# Altium PCB PCB.PcbDoc (part 1 of 2)
Units mm, origin at the board's own origin, x right, y up, seen from the top; angles counter-clockwise.
Board outline 65 x 70 mm, 2 copper layers (Top Layer, Bottom Layer), stack 0.325 mm thick; 95 components, 63 nets, 365 pads, 289 vias.
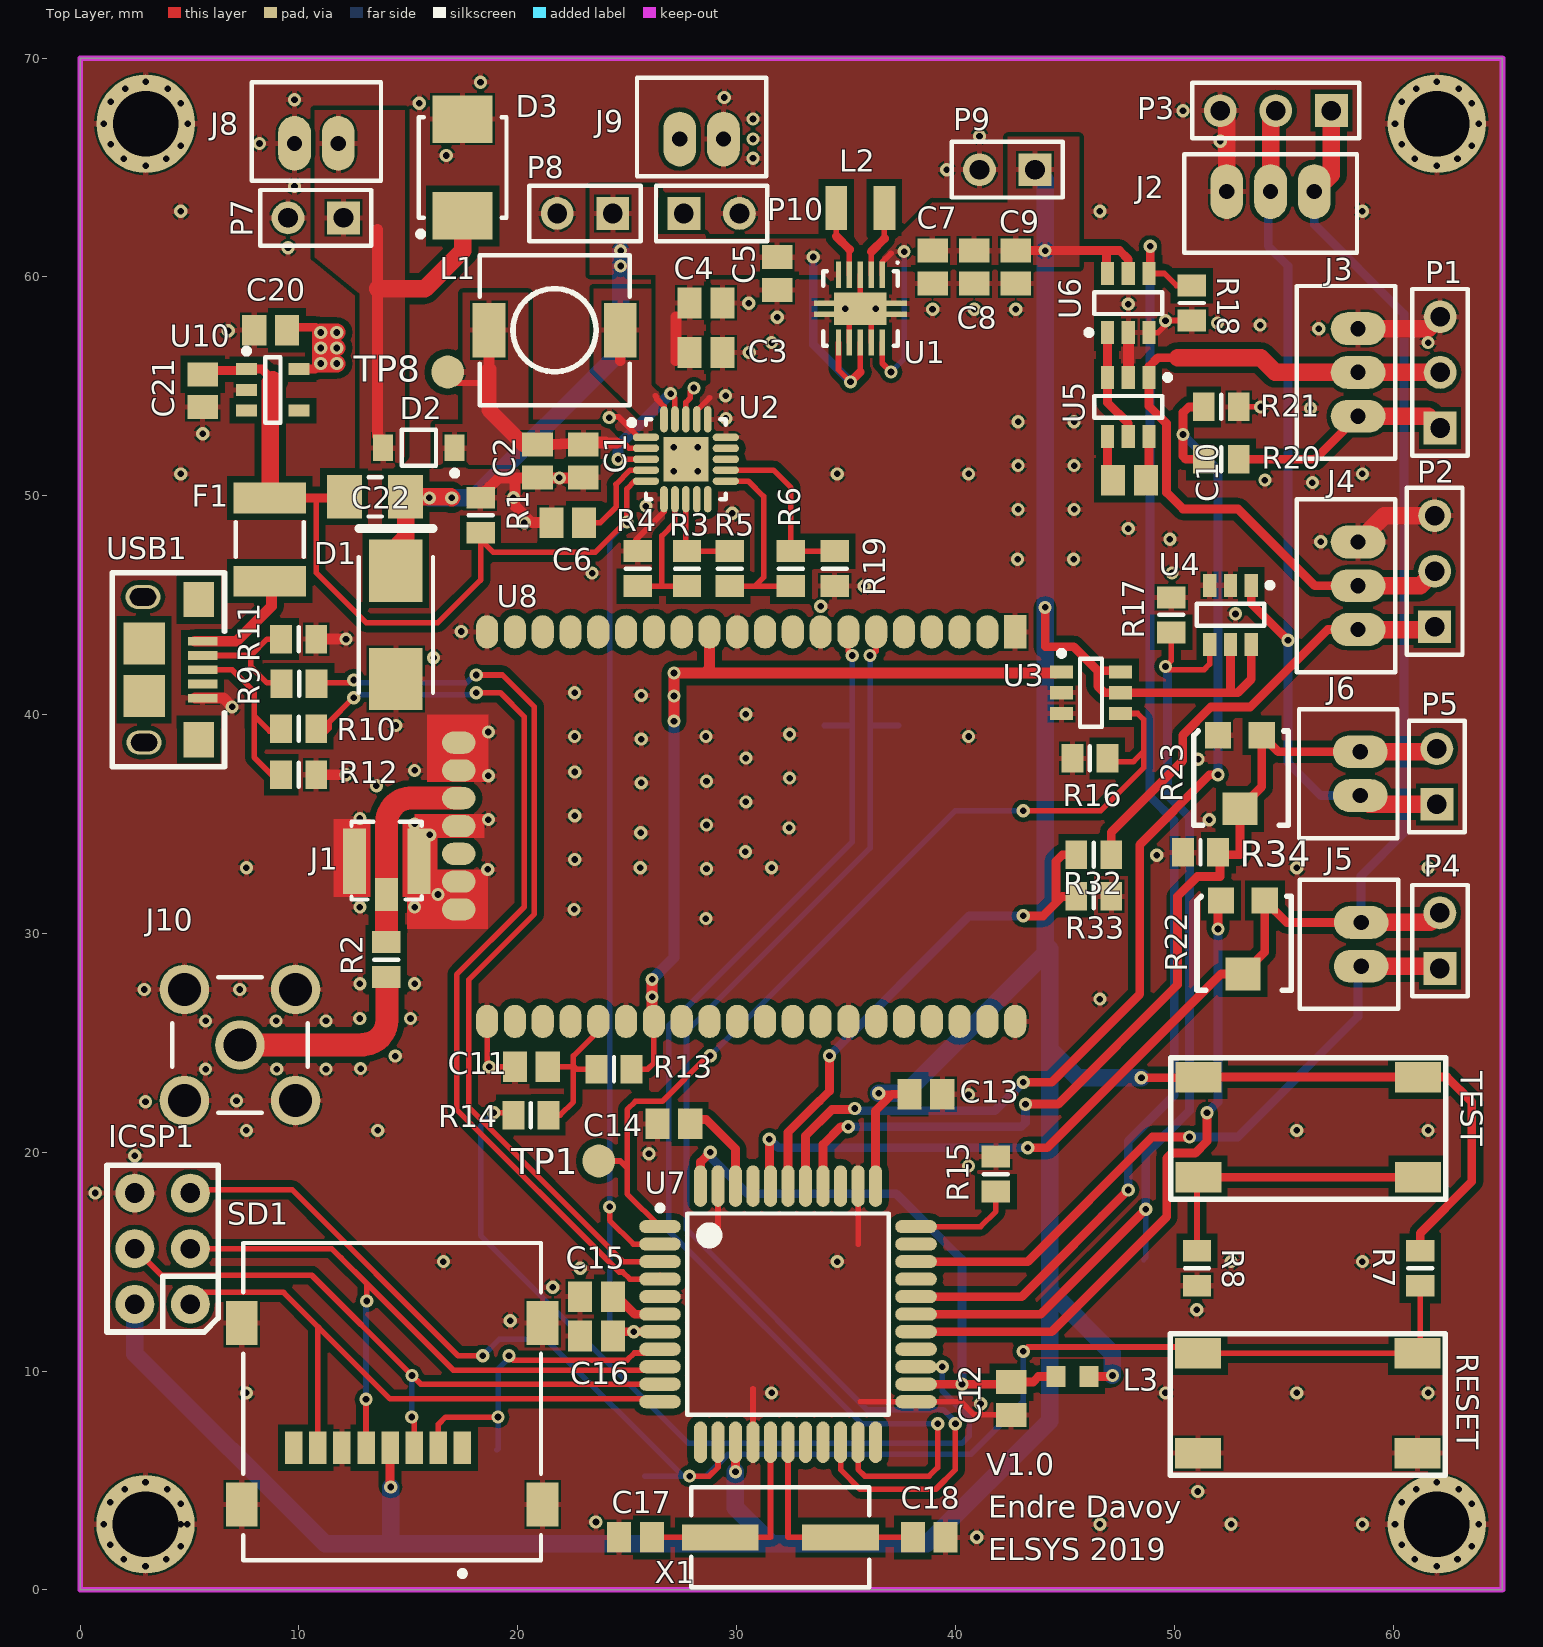
[diagram p0: Top Layer view]
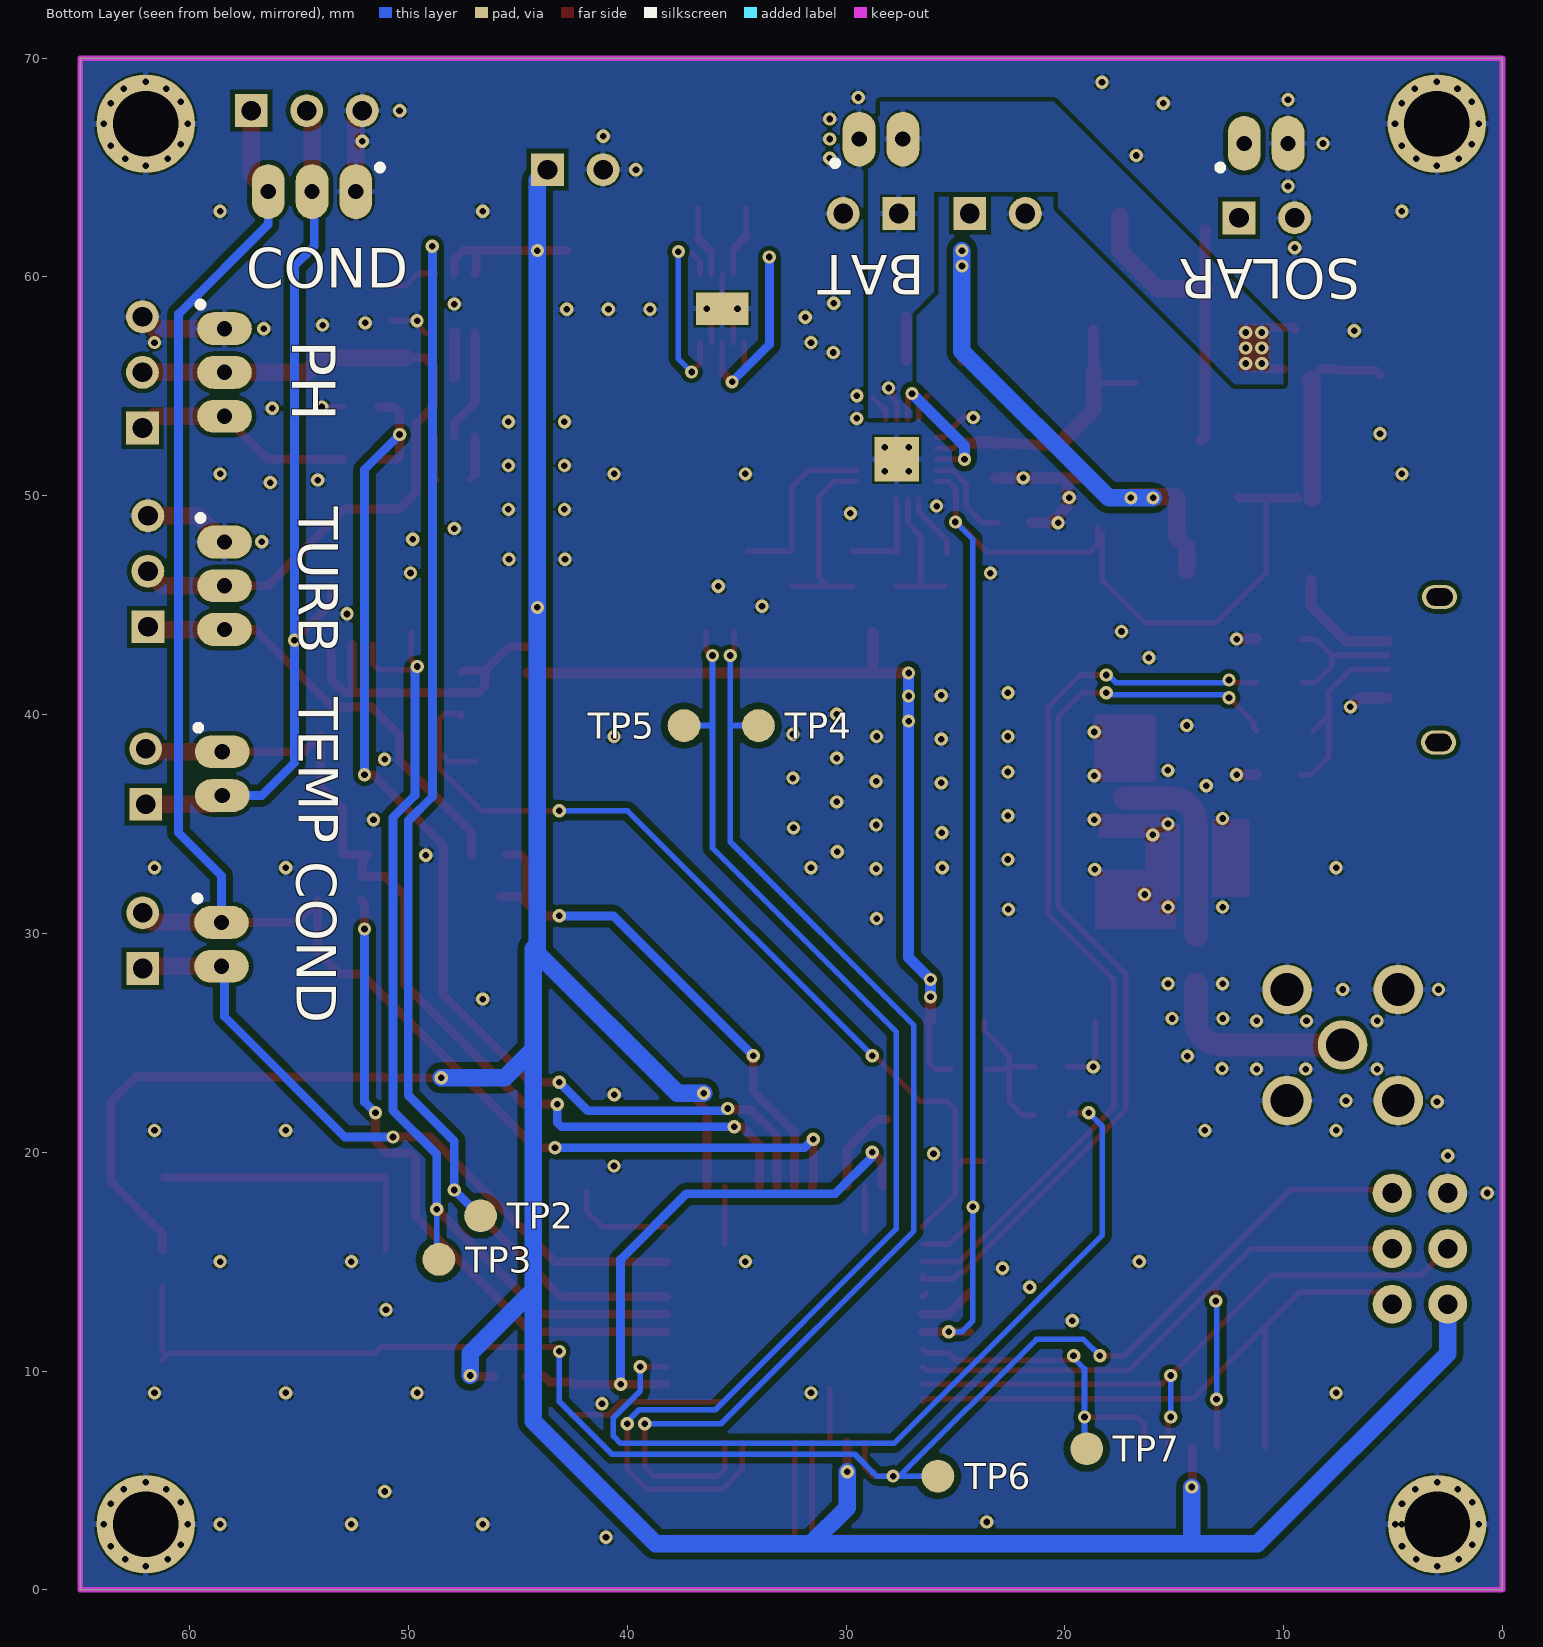
[diagram p1: Bottom Layer view, seen from below]

## Layer stack, top to bottom
Top Solder: solder mask 0.0102, Solder Resist, Dk 3.5
Top Layer: signal copper 0.0356
Dielectric 1: core 0.254, FR-4, Dk 4.2
Bottom Layer: signal copper 0.0356
Bottom Solder: solder mask 0.0102, Solder Resist, Dk 3.5

## Board outline
0,0 65,0 65,70 0,70 0,1.2

## Design rules (kind name [scope] priority, off if disabled: settings)
Clearance [All] p1: gap=0.2 ignorepadtopadclearanceinfootprint=TRUE except(0.1: Arc-Text Track-SMDPad Track-Text Fill-Text Poly-Text Region-Text Text-Text; 0.3: Arc-Poly Arc-Region Track-Poly Track-Region SMDPad-Poly SMDPad-Region)
MinimumSolderMaskSliver [All] p1 off: minsoldermaskwidth=0.254
PolygonConnect [All] p1: connectstyle=Relief reliefconductorwidth=0.254 reliefentries=4 polygonreliefangle="90 Angle" airgapwidth=0.1
RoutingVias [All] p1: holewidth=0.3 width=0.6 viastyle="Through Hole" minholewidth=0.3 minwidth=0.6 maxholewidth=0.711 maxwidth=1.27
SilkToSilkClearance [All] p1 off: silktosilkclearance=0.254
SilkToSolderMaskClearance [IsPad] p1 off: minsilkscreentomaskgap=0.254 clearancetoexposedcopper=TRUE
SolderMaskExpansion SolderMaskExpansion_1 [All] p1: expansion=0.102
SolderMaskExpansion [All] p2: expansion=0.152
Width ANTENNA1 [InNet('ANT50')] p1: maxlimit=2 minlimit=0.254 preferedwidth=0.254
Width ANTENNA2 [InNet('NetJ10_S')] p2: maxlimit=2 minlimit=0.254 preferedwidth=0.254
Width [All] p3: maxlimit=0.8 minlimit=0.254 preferedwidth=0.4 minimp=50.000000 maximp=50.000000 favimp=50.000000
27 further rules are at their usual default settings.

## Classes and differential pairs
component class Power: C1 C2 C3 C4 C5 C6 C7 C8 C9 C20 C21 D2 D3 J8 J9 L1 L2 P7 P8 P9 P10 R1 R3 R4 R5 R6 R19 U1 U2 U10
component class Sensors: J2 J3 J4 J5 J6 P1 P2 P3 P4 P5 R20 R21 R22 R23 R32 R33 R34
component class "Main Schematic": C10 C11 C12 C13 C14 C15 C16 C17 C18 C22 CALIBRATE D1 F1 ICSP1 J1 J10 L3 R2 R7 R8 R9 R10 R11 R12 R13 R14 R15 R16 R17 R18 RESET SD1 U3 U4 U5 U6 U7 U8 USB1 X1

## Components (designator, comment, footprint, x,y, rotation, side; value= is the part's Value field where it differs from the comment)
C1 "Capacitor" C0805 23,51.588 r270 top value=100nF
C2 "Capacitor" C0805 20.9,51.588 r270 top value=4.7uF
C3 "Capacitor" C0805 28.6,56.545 r0 top value=10nF
C4 "Capacitor" C0805 28.6,58.809 r0 top value=4.7uF
C5 "Capacitor" C0805 31.857,60.155 r270 top value=4.7uF
C6 "Capacitor" C0805 22.284,48.768 r180 top value=10nF
C7 "Capacitor" C0805 38.957,60.455 r270 top value=10uF
C8 "Capacitor" C0805 40.857,60.455 r270 top value=10uF
C9 "Capacitor" C0805 42.757,60.455 r270 top value=100nF
C10 "Capacitor" C0805 47.95,50.707 r180 top value=220nF
C11 "Cap" C0805 20.62,23.9 r180 top value=0.1uF
C12 "Capacitor" C0805 42.55,8.75 r270 top value=100nF
C13 "Capacitor" C0805 38.65,22.65 r0 top value=100nF
C14 "Capacitor" C0805 27.134,21.3 r180 top value=100nF
C15 "Capacitor" C0805 23.6,13.4 r180 top value=1uF
C16 "Capacitor" C0805 23.6,11.6 r180 top value=1uF
C17 "Capacitor" C0805 25.379,2.4 r180 top value=22pF
C18 "Capacitor" C0805 38.802,2.4 r0 top value=22pF
C20 "Capacitor" C0805 8.708,57.568 r180 top value=1uF
C21 "Capacitor" C0805 5.6,54.798 r270 top value=1uF
C22 "TAJC107K016RNJ" AVX-TAJ-C-2_M 14.429,44.1 r270 top
D1 "Diode" 3216[1206] 13.477,49.95 r0 top
D2 "MBR120VLSFT3G" ONSC-SOD-123FL-2-498-01_V 15.484,52.191 r180 top
D3 "1SMB5918BT3G" ONSC-SMB-2-403A-03_H_V 17.484,65 r90 top
F1 "Fuse 1" 1812 8.667,48 r90 top
ICSP1 "ICSP" ICSP 5.04,13.055 r180 top
J1 "U.FL-R-SMT" U.FL-R-SMT 14.005,33.3 r0 top
J2 "B3B-PH-K-S(LF)(SN)" "JST B3B-PH-K" 54.4,63.9 r0 top
J3 "B3B-PH-K-S(LF)(SN)" "JST B3B-PH-K" 58.4,55.637 r270 top
J4 "B3B-PH-K-S(LF)(SN)" "JST B3B-PH-K" 58.4,45.887 r270 top
J5 "B2B-PH-K-S(LF)(SN)" "JST B2B-PH-K" 58.539,29.5 r270 top
J6 "B2B-PH-K-S(LF)(SN)" "JST B2B-PH-K" 58.5,37.3 r270 top
J8 "B2B-PH-K-S(LF)(SN)" "JST B2B-PH-K" 10.8,66.1 r180 top
J9 "B2B-PH-K-S(LF)(SN)" "JST B2B-PH-K" 28.4,66.3 r180 top
J10 "0733910060" "MOLEX SD-73391-0060" 7.305,24.9 r0 top
L1 "Inductor" SRR0604 21.684,57.568 r180 top value=22uH
L2 "Inductor" MLP2520 35.657,63.155 r180 top value=2.2uH
L3 "Inductor" C0603 45.35,9.75 r180 top value=10uH
P1 "PH connector" HDR1X3 62.15,53.097 r90 top
P2 "Turbidity connector" HDR1X3 61.9,44.01 r90 top
P3 "Conductivity" HDR1X3 57.18,67.6 r180 top
P4 "Conductivity" HDR1X2 62.139,28.4 r90 top
P5 "Temp" HDR1X2 62,35.9 r90 top
P7 "Header 2" HDR1X2 12.04,62.7 r180 top
P8 "Header 2" HDR1X2 24.343,62.9 r180 top
P9 "Header 2" HDR1X2 43.64,64.9 r180 top
P10 "Header 2" HDR1X2 27.59,62.9 r0 top
R1 "Resistor" 6-0805_L 18.3,49.109 r90 top value=10K
R2 "Res1" 6-0805_L 13.989,28.8 r270 top value=0R
R3 "Resistor" 6-0805_L 27.734,46.668 r270 top value=7.32M
R4 "Resistor" 6-0805_L 25.484,46.668 r90 top value=5.62M
R5 "Resistor" 6-0805_L 29.684,46.668 r270 top value=1.87M
R6 "Resistor" 6-0805_L 32.484,46.668 r90 top value=5.49M
R7 "Resistor" 6-0805_L 61.239,14.7 r270 top value=10K
R8 "Resistor" 6-0805_L 51.039,14.7 r270 top value=10K
R9 "Resistor" 6-0805_L 10.008,41.405 r0 top value=22R
R10 "Resistor" 6-0805_L 9.989,39.35 r0 top value=22R
R11 "Res Varistor" 6-0805_L 9.989,43.45 r180 top
R12 "Res Varistor" 6-0805_L 9.989,37.25 r180 top
R13 "Res1" 6-0805_L 24.4,23.8 r180 top value=10K
R14 "Res1" 6-0805_L 20.6,21.7 r0 top value=0R
R15 "Resistor" 6-0805_L 41.85,19 r90 top value=10K
R16 "Resistor" 6-0805_L 46.146,38 r180 top value=10K
R17 "Resistor" 6-0805_L 49.863,44.559 r90 top value=10K
R18 "Resistor" 6-0805_L 50.8,58.807 r270 top value=10K
R19 "Resistor" 6-0805_L 34.484,46.668 r270 top value=5.62M
R20 "Resistor" 6-0805_L 52.15,51.668 r180 top value=10K
R21 "Resistor" 6-0805_L 52.15,54.059 r0 top value=20K
R22 "Potentiometer" Trimmer 53.139,29.8 r270 top
R23 "Potentiometer" Trimmer 53,37.35 r270 top
R32 "Resistor" 6-0805_L 46.323,33.592 r180 top value=10K
R33 "Resistor" 6-0805_L 46.323,31.692 r0 top value=20K
R34 "Resistor" 6-0805_L 51.2,33.7 r180 top value=10K
RESET "SW-PB" BUTTON 51.089,10.822 r0 top
SD1 "47219-2001" MOLX-47219-2001-8_V 14.261,8.05 r180 top
TEST "SW-PB" BUTTON 51.106,23.433 r0 top (schematic designator CALIBRATE)
TP1 "Comment" Testpoint 23.6,19.6 r0 top
TP2 "Comment" Testpoint 46.8,17.1 r180 bottom
TP3 "Comment" Testpoint 48.7,15.1 r180 bottom
TP4 "Comment" Testpoint 34.1,39.5 r180 bottom
TP5 "Comment" Testpoint 37.5,39.5 r180 bottom
TP6 "Comment" Testpoint 25.9,5.2 r180 bottom
TP7 "Comment" Testpoint 19.1,6.45 r180 bottom
TP8 "Comment" Testpoint 16.7,55.655 r0 top
U1 "TPS63001" DRC0010J 35.657,58.555 r270 top
U2 "BQ25505" S-PVQFN-N20 27.684,51.668 r0 top
U3 "TPS22860" "DBV PSOP" 46.196,41 r0 top
U4 "TPS22860" "DBV PSOP" 52.571,44.559 r270 top
U5 "REG71050" "DBV PSOP" 47.9,54.057 r270 top
U6 "TPS22860" "DBV PSOP" 47.9,58.807 r90 top
U7 "ATmega32U4-MU" TQFP44 32.35,12.6 r0 top
U8 "RN2483" "RN2483 - duplicate" 18.605,43.778 r270 top
U10 "MAX1555EZK+T" MAXM-Z5+1_N 8.808,54.837 r0 top
USB1 "Header 5" 10118193-0001LF 6.275,42.05 r270 top
X1 "16 Mhz" "XTAL CSM-3X" 32,2.4 r0 top value=8MHz

## Footprints (in the part's own frame and the unit in brackets; to place one, negate y for a bottom-side part, rotate by r counter-clockwise, add the part's x,y. Pads: shape width x height; smd on the part's side, far side on the other; paste and mask are expansions set on the pad)
6-0805_L [mm] "Chip Resistor, Body 2.0x1.2mm, IPC High Density"
  rect 1x1.3 smd: 1(-0.8,0) 2(0.8,0)
  silkscreen extent 0,-0.55 0,0.55, body extent -1.07,-0.7 1.07,0.7, height 0.7
1812 [mm] "Chip Capacitor, Body 4.5x3.2mm, IPC High Density"
  rect 1.4x3.3 smd: 1(-1.9,0) 2(1.9,0)
  silkscreen extent -0.8,-1.55 0.8,1.55, body extent -2.4,-1.7 2.4,1.7, height 1.4
3216[1206] [mm] "Metal Electrode Face (MELF) Resistor; Body 3.2 x 1.8 mm (LxDia)"
  rect 1.6x2 smd: 1(-1.4,0) 2(1.4,0)
  silkscreen extent -0.3,-0.9 0.3,0.9
10118193-0001LF [mm] "Mirco USB Connector"
  rect 0.4x1.35 smd: 1(-1.3,-0.675) 2(-0.65,-0.675) 3(0,-0.675) 4(0.65,-0.675) 5(1.3,-0.675)
  oval 1.1x1.6 hole 0.8 slot 1.2 at 90 deg: ""(-3.325,-3.4) ""(3.325,-3.35)
  rect 1.6x1.4 smd: ""(-3.2,-0.85) ""(3.2,-0.85)
  rect 1.9x1.9 smd: ""(-1.2,-3.35) ""(1.2,-3.35)
  silkscreen extent -4.43,-4.8 4.43,0.33, body extent -3.98,-6.01 4.01,-0.59, height 2.77
AVX-TAJ-C-2_M [mm] "Molded Capacitor, 2-Leads, Body 6.2x3.4mm, IPC Low Density"
  rect 2.85x2.45 smd: 1(-2.475,0) 2(2.475,0)
  silkscreen extent -4.4,-1.7 3.1,1.7, body extent -3.32,-1.7 3.32,1.7, height 2.8
BUTTON [mm]
  rect 2.1x1.4 smd: 1(0,0) 1(10.033,0) 2(0,-4.572) 2(10.033,-4.572)
  silkscreen extent -1.27,-5.59 11.3,0.89, body extent 1.14,-5.33 8.89,0.76, height 3
C0603 [mm]
  rect 0.86x0.965 smd: 1(-0.75,0) 2(0.75,0)
  body extent -0.88,-0.48 0.88,0.48, height 0.51
C0805 [mm] "Chip Capacitor, Body 2.0x1.3mm, IPC High Density"
  rect 1.1x1.4 smd: 1(-0.75,0) 2(0.75,0)
  body extent -1.1,-0.72 1.1,0.72, height 1.4
"DBV PSOP" [mm] "TSOP, 6-Leads, Body 2,90x1,60mm, Pitch 0,95mm, IPC Low Density"
  rect 1.05x0.6 smd: 1(-1.35,0.95) 2(-1.35,0) 3(-1.35,-0.95) 4(1.35,-0.95) 5(1.35,0) 6(1.35,0.95)
  silkscreen extent -1.47,-1.55 0.5,1.92, body extent -1.39,-1.55 1.39,1.55, height 1.45
DRC0010J [mm] "SON, 10-Leads, Body 3,00x3,00mm, Pitch 0,50mm, Thermal Pad 2,40x1,49mm, IPC Medium Density"
  rect 1.2x0.25 smd: 1(-1.55,1) 2(-1.55,0.5) 3(-1.55,0) 4(-1.55,-0.5) 5(-1.55,-1) 6(1.55,-1) 7(1.55,-0.5) 8(1.55,0) 9(1.55,0.5) 10(1.55,1)
  rect 0.25x1.2 smd: 11(-0.238,1.524) 11(-0.238,-1.524) 11(0.262,1.524) 11(0.262,-1.524)
  rect 1.49x2.4 smd: 11(0,0)
  rect 1.49x2.4 smd far side: 11(0,0)
  silkscreen extent -2.15,-1.7 1.7,1.75, body extent -1.55,-1.55 1.55,1.55, height 1
HDR1X2 [mm] "Connector; Header; 2 Position"
  rect 1.5x1.5 hole 0.9: 1(0,0)
  round 1.5 hole 0.9: 2(2.54,0)
  silkscreen extent -1.27,-1.27 3.81,1.27
HDR1X3 [mm] "Connector; Header; 3 Position"
  rect 1.5x1.5 hole 0.9: 1(0,0)
  round 1.5 hole 0.9: 2(2.54,0) 3(5.08,0)
  silkscreen extent -1.27,-1.27 6.35,1.27
ICSP [mil]
  round 70 hole 35.43: 1(0,0) 2(100,0) 3(0,-100) 4(100,-100) 5(0,-200) 6(100,-200)
  silkscreen extent -50,-250 150,50, body extent -50,-250 150,50, height 485
"JST B2B-PH-K" [mm]
  oval 1.5x2.5 hole 0.7: 1(-1,0) 2(1,0)
  silkscreen extent -2.95,-2.8 2.95,1.7, body extent -2.95,-2.8 2.95,1.7, height 6
"JST B3B-PH-K" [mm]
  oval 1.5x2.5 hole 0.7: 1(-2,0) 2(0,0) 3(2,0)
  silkscreen extent -3.95,-2.8 3.95,1.7, body extent -3.95,-2.8 3.95,1.7, height 6
MAXM-Z5+1_N [mm] "SOT23, 5-Leads, Body 3x1.65mm, Pitch 0.95mm, IPC Medium Density"
  rect 0.95x0.55 smd: 1(-1.2,0.95) 2(-1.2,0) 3(-1.2,-0.95) 4(1.2,-0.95) 5(1.2,0.95)
  silkscreen extent -1.32,-1.5 0.35,1.9, body extent -0.82,-1.5 0.82,1.5, height 1.1
MLP2520 [mm]
  rect 1x2 smd: 1(1.1,0) 2(-1.1,0)
"MOLEX SD-73391-0060" [mm]
  round 2.262 hole 1.5: G(-2.54,-2.54) G(-2.54,2.54) G(2.54,-2.54) G(2.54,2.54) S(0,0)
  silkscreen extent -3.1,-3.1 3.1,3.1, body extent -3.17,-3.17 3.18,3.18, height 9.6
MOLX-47219-2001-8_V [mm] "CONN, 8-Leads, Body 14.5x13.6mm, Pitch 1.1mm"
  rect 0.8x1.5 smd: 1(-3.205,1.55) 2(-2.105,1.55) 3(-1.005,1.55) 4(0.095,1.55) 5(1.195,1.55) 6(2.295,1.55) 7(3.395,1.55) 8(4.495,1.55)
  rect 1.45x2 smd: 9(6.875,4.15) 10(6.875,-4.15) 11(-6.875,-4.15) 12(-6.875,4.15)
  silkscreen extent -6.8,-7.8 6.8,7.42, body extent -7.3,-7.79 7.3,6.71, height 1.91
ONSC-SMB-2-403A-03_H_V [mm] "Molded, 2-Leads, Body 4.6x3.95mm"
  rect 2.159x2.743 smd: 1(-2.21,0) 2(2.21,0)
  silkscreen extent -3.16,-2 2.3,2.05, body extent -2.3,-1.97 2.3,1.97, height 2.42
ONSC-SOD-123FL-2-498-01_V [mm] "SOD, 2-Leads, Body 2.7x1.65mm"
  rect 0.91x1.22 smd: 1(-1.635,0) 2(1.635,0)
  silkscreen extent -1.76,-0.82 0.78,1.28, body extent -1.35,-0.82 1.35,0.82, height 1
"RN2483 - duplicate" [mil]
  rect 60x40 smd: 1(0,949.8)
  oval 60x40 smd: 2(0,899.8) 3(0,849.8) 4(0,799.8) 5(0,749.8) 6(0,699.8) 7(0,649.8) 8(0,599.8) 9(0,549.8) 10(0,499.8) 11(0,449.8) 12(0,399.8) 13(0,349.8) 14(0,299.8) 15(0,249.8) 16(0,199.8) 17(0,149.8) 18(0,99.8) 19(0,49.8) 20(0,-0.2) 28(700.79,-0.2) 29(700.79,49.8) 30(700.79,99.8) 31(700.79,149.8) 32(700.79,199.8) 33(700.79,249.8) 34(700.79,299.8) 35(700.79,349.8) 36(700.79,399.8) 37(700.79,449.8) 38(700.79,499.8) 39(700.79,549.8) 40(700.79,599.8) 41(700.79,649.8) 42(700.79,699.8) 43(700.79,749.8) 44(700.79,799.8) 45(700.79,849.8) 45(700.79,899.8) 47(700.79,949.8)
  oval 40x60 smd: 21(199.21,-51.18) 22(249.21,-51.18) 23(299.21,-51.18) 24(349.21,-51.18) 25(399.21,-51.18) 26(449.21,-51.18) 27(499.21,-51.18)
  body extent 0,-48 700,973, height 71
S-PVQFN-N20 [mm] "PQFN, 20-Leads, Body 3,50x3,50mm, Pitch 0,50mm, Thermal Pad 2,05x2,05mm, IPC Medium Density"
  oval 1.2x0.35 smd: 1(-1.825,1) 2(-1.825,0.5) 3(-1.825,0) 4(-1.825,-0.5) 5(-1.825,-1) 11(1.825,-1) 12(1.825,-0.5) 13(1.825,0) 14(1.825,0.5) 15(1.825,1)
  oval 0.35x1.2 smd: 6(-1,-1.825) 7(-0.5,-1.825) 8(0,-1.825) 9(0.5,-1.825) 10(1,-1.825) 16(1,1.825) 17(0.5,1.825) 18(0,1.825) 19(-0.5,1.825) 20(-1,1.825)
  rect 2.05x2.05 smd: 21(0,0)
  rect 2.05x2.05 smd far side: 21(0,0)
  silkscreen extent -2.6,-1.83 1.83,1.83, body extent -1.83,-1.83 1.83,1.83, height 1
SRR0604 [mm]
  rect 1.5x2.5 smd: 1(3,0) 2(-3,0)
  silkscreen extent -3.43,-3.43 3.43,3.43, body extent -3.25,-3.25 3.25,3.25, height 4.6
Testpoint [mm]
  round 1.5 smd paste+0: 1(0.1,0)
TQFP44 [mm]
  oval 1.9x0.6 smd: 1(-5.85,4) 2(-5.85,3.2) 3(-5.85,2.4) 4(-5.85,1.6) 5(-5.85,0.8) 6(-5.85,0) 7(-5.85,-0.8) 8(-5.85,-1.6) 9(-5.85,-2.4) 10(-5.85,-3.2) 11(-5.85,-4) 23(5.85,-4) 24(5.85,-3.2) 25(5.85,-2.4) 26(5.85,-1.6) 27(5.85,-0.8) 28(5.85,0) 29(5.85,0.8) 30(5.85,1.6) 31(5.85,2.4) 32(5.85,3.2) 33(5.85,4)
  oval 0.6x1.9 smd: 12(-4,-5.85) 13(-3.2,-5.85) 14(-2.4,-5.85) 15(-1.6,-5.85) 16(-0.8,-5.85) 17(0,-5.85) 18(0.8,-5.85) 19(1.6,-5.85) 20(2.4,-5.85) 21(3.2,-5.85) 22(4,-5.85) 34(4,5.85) 35(3.2,5.85) 36(2.4,5.85) 37(1.6,5.85) 38(0.8,5.85) 39(0,5.85) 40(-0.8,5.85) 41(-1.6,5.85) 42(-2.4,5.85) 43(-3.2,5.85) 44(-4,5.85)
  silkscreen extent -5.97,-4.6 4.6,4.97, body extent -6,-6 6,6, height 1.2
Trimmer [mm]
  rect 1.2x1.2 smd: 1(-1.7,1) 2(-1.7,-1)
  rect 1.5x1.6 smd: 3(1.65,0)
  silkscreen extent -1.9,-2.1 2.4,2.2, body extent -1.8,-2 2.2,2, height 1.7
U.FL-R-SMT [mm]
  rect 1.05x1.5 smd: 1(0,-1.525)
  rect 1.05x3 smd: 2(-1.475,0) 3(1.475,0)
  silkscreen extent -1.6,-1.75 1.6,1.8, body extent -1.5,-1.55 1.5,1.55, height 1.25
"XTAL CSM-3X" [mm] "Crystal 16Mhz"
  rect 3.5x1.2 smd: 1(-2.75,0) 2(2.75,0)
  silkscreen extent -4.06,-2.29 4.06,2.29, body extent -3.8,-2.05 3.8,2.05, height 2.3

## Part data
C1 C2 C3 C4 C5 C6 C7 C8 C9 C10 C12 C13 C14 C15 C16 C17 C18 C20 C21: Package=0603, Tolerance=10%, Voltage=16V
C11: "Capacitor", LatestRevisionDate=17-Jul-2002, LatestRevisionNote="Re-released for DXP Platform.", PackageDescription="Radial Cap, Thru-Hole; 2 Leads; 0.3 in Pin Spacing", PackageReference=RAD-0.3, Published=8-Jun-2000, Publisher="Altium Limited"
C22: library part CMP-2100-03691-1, "Standard Tantalum, 100 uF, +/- 10%, 16 V, -55 to 125 degC, 2-Pin SMD (2312), RoHS, Tape and Reel", Capacitance=100uF, Case/Package=Molded, Case Code (Imperial)=2412, Case Code (Metric)=6032, ESR (Equivalent Series Resistance)=1Ohm, Leakage Current=16uA, Manufacturer=AVX, Max Operating Temperature=125degC, Min Operating Temperature=-55degC, Package Description="2-Pin Surface Mount Device, Body 6 x 3.25 mm", Package Quantity=1, Package Reference=TAJ-C-2, Tolerance=10%, Voltage Rating=16V, Datasheet URL=http://datasheets.avx.com/TAJ.pdf, Datasheet Version=42401.0, Depth=3.2mm, Dissipation Factor=8%, Height=2.8mm, Height - Seated (Max)=0.11inch, Lead Free=LeadFree, Length=6mm, Manufacturer URL=http://www.avx.com/, Number of Pins=2, Packaging=TapeandReel, Polarity=Polar, Radiation Hardening=No, REACH SVHC=NoSVHC, Resistance=1Ohm, RoHSCompliant=True, Termination=SMD/SMT, Voltage Rating (DC)=16V, Width=3.2mm
D1: "Default Diode", Code_JEDEC=DO-214-AB, LatestRevisionDate=17-Jul-2002, LatestRevisionNote="Re-released for DXP Platform.", PackageDescription="DO-214-AB/SMC; 2 C-Bend Leads; Body 7.9 x 5.9 mm, inc. leads (LxW)", PackageReference=SMC, PackageVersion=Sep-1996, Published=8-Jun-2000, Publisher="Altium Limited"
D2: library part CMP-1055-00447-1, "Schottky Power Rectifier, 2-Pin SOD-123, Pb-Free, Tape and Reel", Manufacturer="On Semiconductor", ComponentLink1Description="Manufacturer URL", ComponentLink1URL=http://www.onsemi.com/, ComponentLink2Description=Datasheet, ComponentLink2URL=http://www.onsemi.cn/pub_link/Collateral/MBR120VLSFT1-D.PDF, ComponentLink3Description="Package Specification", ComponentLink3URL=http://www.onsemi.cn/pub_link/Collateral/MBR120VLSFT1-D.PDF, Configuration=Single, DatasheetVersion="Rev. 2", IFSM Max (A)=45, Mounting Technology="Surface Mount", PackageDescription="2-Pin SOD, Body 1.65 x 2.7 mm", PackageReference=SOD-123FL-2-498-01, PackageVersion="Rev. A", Packing="Tape and Reel", PartNumber=MBR120VLSFT3G, RoHS=TRUE
D3: library part CMP-1060-00206-1, "3 W Zener Voltage Regulator, 2-Pin SMB, Pb-Free, Tape and Reel", Manufacturer="On Semiconductor", ComponentLink1Description="Manufacturer URL", ComponentLink1URL=http://www.onsemi.com/, ComponentLink2Description=Datasheet, ComponentLink2URL=http://www.onsemi.com/pub_link/Collateral/1SMB5913BT3-D.PDF, ComponentLink3Description="Package Specification", ComponentLink3URL=http://www.onsemi.com/pub_link/Collateral/1SMB5913BT3-D.PDF, DatasheetVersion="Rev. 8", Mounting Technology="Surface Mount", PackageDescription="2-Pin Small Molded Package, J-Bend Lead, Body 4.33 x 3.625 mm", PackageReference=SMB-2-403A-03_H, PackageVersion="Rev. H, 05/2011", Packing="Tape and Reel", PartNumber=1SMB5918BT3G, RoHS=Pb-Free, VZ Typ (V)=5.1
F1: "Fuse", LatestRevisionDate=17-Jul-2002, LatestRevisionNote="Re-released for DXP Platform.", PackageDescription="Thru-Hole; 2 Leads", PackageReference=PIN-W2/E2.8, Published=8-Jun-2000, Publisher="Altium Limited"
J2 J3 J4: "CONN HEADER PH TOP 3POS 2MM", Colour=Natural, Manufacturer="JST Sales America Inc.", Supplier Part Number 1=455-1705-ND, ComponentLink1Description=Datasheet, ComponentLink1URL=http://www.jst-mfg.com/product/pdf/eng/ePH.pdf, ComponentLink2Description="Digi-Key Listing", ComponentLink2URL=http://www.digikey.com/product-detail/en/jst-sales-america-inc/B3B-PH-K-S(LF)(SN)/455-1705-ND/926612, Contact Finish=Tin, Fastening Type="Detent Lock", Number Of Positions=3, Number Of Rows=1, PartId=29448, Part Number=B3B-PH-K-S(LF)(SN), Pitch="0.079\" (2.00mm)", Price=0,19, Series=PH, Supplier 1=Digi-Key, Type="Header, Shrouded"
J5 J6 J8 J9: "CONN HEADER PH TOP 2POS 2MM", Colour=Natural, Manufacturer="JST Sales America Inc.", Supplier Part Number 1=455-1704-ND, ComponentLink1Description=Datasheet, ComponentLink1URL=http://www.jst-mfg.com/product/pdf/eng/ePH.pdf, ComponentLink2Description="Digi-Key Listing", ComponentLink2URL=http://www.digikey.com/product-detail/en/jst-sales-america-inc/B2B-PH-K-S(LF)(SN)/455-1704-ND/926611, Contact Finish=Tin, Fastening Type="Detent Lock", Number Of Positions=2, Number Of Rows=1, PartId=29447, Part Number=B2B-PH-K-S(LF)(SN), Pitch="0.079\" (2.00mm)", Price=0,17, Series=PH, Supplier 1=Digi-Key, Type="Header, Shrouded"
J10: "CONN SMA JACK STR 50 OHM PCB", Part Number=0733910060
L1: Case/Package=0604, Current Rating=900mA, DC Resistance (DCR)=190mR, Frequency=25MHz, Inductance=22uh, Inductance Tolerance=20%, Manufacturer=Bourns, Max Operating Temperature=125°C, Min Operating Temperature=-40°C, Package Quantity=1000, Resistance=190MR, Saturation Current=1.2A, Supplier Part Number 1=652-SRR0604-220ML, Test Frequency=1kHz, ComponentLink1Description=http://uk.rs-online.com/webdocs/0fa5/0900766b80fa5950.pdf, ComponentLink1URL=http://uk.rs-online.com/webdocs/0fa5/0900766b80fa5950.pdf, ComponentLink2Description=https://www.alliedelec.com/m/d/db85a2264958f44ba0f102d64e276dc0.pdf, ComponentLink2URL=https://www.alliedelec.com/m/d/db85a2264958f44ba0f102d64e276dc0.pdf, ComponentLink3Description=http://www.bourns.com/docs/Product-Datasheets/SRR0604.pdf, ComponentLink3URL=http://www.bourns.com/docs/Product-Datasheets/SRR0604.pdf, ComponentLink4Description=https://www.bourns.com/docs/Product-Datasheets/SRR0604.pdf, ComponentLink4URL=https://www.bourns.com/docs/Product-Datasheets/SRR0604.pdf, ComponentLink5Description=http://www.farnell.com/datasheets/1723201.pdf, ComponentLink5URL=http://www.farnell.com/datasheets/1723201.pdf, ComponentLink6Description=http://components.arrow.com/part/dataview/41632166S7459348N1506, ComponentLink6URL=http://components.arrow.com/part/dataview/41632166S7459348N1506, ComponentLink7Description=http://www.bourns.com/pdfs/SRR0604.pdf, ComponentLink7URL=http://www.bourns.com/pdfs/SRR0604.pdf, Composition=Wirewound, Core Material=Ferrite, DC Current=900mA, Depth=6.7mm, Height=4.8mm, Height - Seated (Max)=0.189inch, Length=6.5mm, Material=Steel, Max DC Current=900mA, Military Standard=Not, Mount="Surface Mount", Packaging="Tape and Reel", Pricing 1="1=0.71, 10=0.658, 50=0.658, 100=0.476, 1000=0.365, 10000=0.365 (USD)", Q Factor=16, REACH SVHC="No SVHC", RMS Current (Irms)=900mA, Self Resonant Frequency=25MHz, Shielding=Shielded, Stock 1=4936, Supplier 1=Mouser, Termination=SMD/SMT, Tolerance=20%, Width=6.5mm
P1 P2 P3: library part "Header 3", "Header, 3-Pin", LatestRevisionDate=17-Jul-2002, LatestRevisionNote="Re-released for DXP Platform.", Publisher="Altium Limited"
P4 P5: library part "Header 2", "Header, 2-Pin", LatestRevisionDate=17-Jul-2002, LatestRevisionNote="Re-released for DXP Platform.", Publisher="Altium Limited"
P7 P8 P9 P10: "Header, 2-Pin", LatestRevisionDate=17-Jul-2002, LatestRevisionNote="Re-released for DXP Platform.", Publisher="Altium Limited"
R1 R3 R4 R5 R6 R7 R8 R9 R10 R15 R16 R17 R18 R19 R20 R21 R32 R33 R34: Package=0602, Power Rating=1/4W, Tolerance=1%
R2 R13 R14: "Resistor", LatestRevisionDate=17-Jul-2002, LatestRevisionNote="Re-released for DXP Platform.", PackageDescription="Axial Device, Thru-Hole; 2 Leads; 0.3 in Pin Spacing", PackageReference=AXIAL-0.3, Published=8-Jun-2000, Publisher="Altium Limited"
R11 R12: "Varistor (Voltage-Sensitive Resistor)", Capacitance=0.5pF, Case/Package=0603, Case Code (Metric)=1608, Clamping Voltage=20V, Current Rating=50nA, Manufacturer=Bourns, Manufacturer Part Number=CG0603MLC-05E, Max Operating Temperature=85°C, Max Voltage Rating (DC)=5V, Min Operating Temperature=-40°C, Package Quantity=1, Supplier Part Number 1=652-CG0603MLC-05E, Voltage Rating (AC)=8V, Case Code (Imperial)=0603, Code_IPC=RESC2012, ComponentLink1Description=https://www.bourns.com/docs/Product-Datasheets/MLC.pdf, ComponentLink1URL=https://www.bourns.com/docs/Product-Datasheets/MLC.pdf, ComponentLink2Description=http://www.farnell.com/datasheets/1785244.pdf, ComponentLink2URL=http://www.farnell.com/datasheets/1785244.pdf, ComponentLink3Description=http://www.jameco.com/Jameco/Products/ProdDS/1163231.pdf, ComponentLink3URL=http://www.jameco.com/Jameco/Products/ProdDS/1163231.pdf, ComponentLink4Description=http://www.bourns.com/docs/Product-Datasheets/MLC.pdf, ComponentLink4URL=http://www.bourns.com/docs/Product-Datasheets/MLC.pdf, Contact Plating=Tin, Depth=0.8mm, Element Configuration=Single, LatestRevisionDate=29-May-2009, LatestRevisionNote="IPC-7351 Footprint Added.", Leakage Current=50nA, Length=1.6mm, Number of Channels=1, Number of Circuits=1, Number of Pins=2, Operating Supply Voltage=5V, PackageDescription="Chip Resistor 0805 Case Size", PackageReference=6-0805, PackageVersion=Mar-2003, Packaging="Tape and Reel", Pricing 1="1=0.51, 10=0.294, 50=0.294, 100=0.171, 1000=0.107, 10000=0.08 (USD)", Published=24-Mar-1999, Publisher="Altium Limited", Radiation Hardening=No, REACH SVHC="No SVHC", Stock 1=88623, Supplier 1=Mouser, Termination=SMD/SMT, Thickness=0.8mm, Turn-On Delay Time=1ns, Voltage=5V, Voltage Rating (DC)=5V, Width=0.8mm, Working Voltage=5V
RESET TEST: "Switch", LatestRevisionDate=17-Jul-2002, LatestRevisionNote="Re-released for DXP Platform.", PackageDescription="Switch; 2 Leads", PackageReference=SPST-2, Published=24-Mar-1999, Publisher="Altium Limited"
SD1: library part CMP-2000-05245-1, "MicroSD Card Connector, Hinge Type, -40 to 85 degC, 8-Pin SMD, RoHS, Tape and Reel", Current Rating=500mA, Manufacturer=Molex, Voltage Rating=100VDC, =0472192001, Brand=Molex, Card Type=microSD, Contact Material=CopperAlloy, Datasheet URL=http://www.molex.com/pdm_docs/sd/472192001_sd.pdf, Datasheet Version="Rev. F, 06/2009", Factory Pack Quantity=2400, Housing Material=Thermoplastic, Insertion - Extraction Style=Hinged, Manufacturer URL=http://www.molex.com/, Mounting Style=SMD/SMT, Number of Contacts=8, Packaging=Reel, Pitch=1.09mm, Product=CardConnectors, Product Category=MemoryCardConnectors, RoHS=Details, Series=47219, Termination Style=SMD
U3 U4 U6: "Load switch", ComponentLink1Description=datasheet, ComponentLink1URL=http://www.ti.com/lit/ds/symlink/tps22860.pdf
U5: "Reguator 5V"
U7: "8-bit AVR Microcontroller, 2.7-5.5V, 32KB Flash, 2.5KB EEPROM, 1KB SRAM, USB Controller, 44-pin QFN, Industrial Grade (-40°C to 85°C)", Supplier Part Number 1=ATMEGA32U4-MU-ND, Code_JEDEC=MO-220-VKKD-1, ComponentLink1Description="Manufacturer Link", ComponentLink1URL=http://www.atmel.com/products/avr/default.asp?, ComponentLink2Description="ATmega16U4/32U4 Datasheet", ComponentLink2URL=http://www.atmel.com/dyn/resources/prod_documents/doc7766.pdf, ComponentLink3Description="ATmega16U4 ATmega32U4 Summary", ComponentLink3URL=http://www.atmel.com/dyn/resources/prod_documents/7766S.pdf, ComponentLink4Description="Atmel.com Home", ComponentLink4URL=http://www.atmel.com, DatasheetVersion="revD, Jan-2009", PackageDescription="44-Pin Quad Flat No-Lead Package, 7 x 7 mm Body, 0.5 mm Pitch (QFN)", PackageReference=44PW, PackageVersion="revF, Jul-2007", Published=1-Apr-2010, Publisher="Altium Limited", Supplier 1=Digi-Key, Supplier 2=Mouser, Supplier Part Number 2=556-ATMEGA32U4-MU
U10: library part CMP-0246-00648-1, "Dual-Input USB/AC Adapter 1-Cell Li+ Battery Charger, 4.2 V Charger Voltage, 0.28 A DC Charging Current, 5-Pin TSOT Package, RoHS, Tape and Reel", Manufacturer=Maxim, Operating Temperature Range="-40 to 85 degC", Package=TSOT, Charger (V)=4.2, ComponentLink1Description="Manufacturer URL", ComponentLink1URL=http://www.maximintegrated.com/, ComponentLink2Description=Datasheet, ComponentLink2URL=http://datasheets.maximintegrated.com/en/ds/MAX1551-MAX1555.pdf, ComponentLink3Description="Package Specification", ComponentLink3URL=http://pdfserv.maximintegrated.com/package_dwgs/21-0113.PDF, DatasheetVersion="Rev. 0", ICHG Typ="0.28 A", Lithium Ion Cells=1, Max Charging VIN (V)=7, Max Protected VIN (V)=7, Mounting Technology="Surface Mount", PackageDescription="5-Pin Thin SOT23, Body 2.9 x 1.6 mm, Pitch 0.95 mm", PackageReference=Z5+1, PackageVersion="Rev. D", Packing="Tape and Reel", PartNumber=MAX1555EZK+T, RoHS=TRUE
USB1: "Header, 5-Pin", LatestRevisionDate=17-Jul-2002, LatestRevisionNote="Re-released for DXP Platform.", Publisher="Altium Limited"
X1: library part NX2520SA-16MHZ-STD-CSW-5, "XTAL SMD 2520, 16MHz, 8pF, ±15ppm", Manufacturer=NDK, Supplier part number=644-1169-1-ND, Artikkelnr Noca=22019192, Artikkelnr Simpro=N.A., Datasheet=http://www.ndk.com/images/products/catalog/c_NX2520SA-STD-CSW-5_e.pdf, Footprint Doc=BT-XTAL_2520, LatestRevisionDate=2012-06-15, Manufacturer Part Number=NX2520SA-16MHZ-STD-CSW-5, Note="XTAL SMD 16.000MHz", Part Number=NX2520SA-16MHZ-STD-CSW-5, Pin Count=4, Published=2012-06-15, Publisher="Nordic Semiconductor", Supplier=Digi-Key
L3: Code_IEC=1005, Code_JEITA=0402, LatestRevisionDate=29-May-2009, LatestRevisionNote="IPC-7351 Footprint Added.", PackageDescription="Chip Inductor", PackageReference=0402-A, Published=8-Jun-2000, Publisher="Altium Limited"
U1: ComponentLink1Description=datasheet, ComponentLink1URL=http://www.ti.com/lit/ds/symlink/tps63001.pdf
U2: ComponentLink1Description=datasheet, ComponentLink1URL=http://www.ti.com/lit/ds/symlink/bq25505.pdf

## Free pads (board coordinates)
  round 4.5 hole 3: 1(2.989,3) 1(3,67) 1(62,3) 1(62,67)

## Via types
v1: diameter 0.6, hole 0.3, Top Layer to Bottom Layer, 189 vias
v2: diameter 0.61, hole 0.305, Top Layer to Bottom Layer, 100 vias

## Nets (pads, with @x,y where several pads share a name; then routed paths per layer and width w, separated by ;. In a path a pad name is that pad's centre, name@x,y a point inside that pad or via, vN(x,y) a via of type N, cw(c..) or ccw(c..) an arc to the next point about the centre after c; other vN are vias at no path point)
3.3V: C7.1 C8.1 C9.1 C13.1 ICSP1.2 L3.1 P9.1 R7.1 SD1.4 TEST.1 U1.1 U1.10 U3.5 U3.6 U4.5 U4.6 U6.5 U6.6 U7.14 U7.34 | length 201.8
  Top Layer w0.254: v2(36.5,22.7) C13.1@37.85,22.7 ; U1.10 36.657,56.055 v1(37.057,55.655) ; U1.1 36.657,60.678 37.057,61.078
  Top Layer w0.4: SD1.4 14.166,4.734 v2(14.2,4.7) ; v2(29.95,5.4) U7.14 ; U7.34 36.35,21.9 37.1,22.65 C13.1 ; C9.1 v1(44.1,61.205) 46.9,61.205 ; v1(44.1,44.9) 44.1,43.1 45.4,43.1 46.5,42 ; L3.1@46.15,9.8 L3.1 47.125,9.75 v2(47.175,9.8) ; U6.6 46.9,60.207 46.9,61.205 ; U3.6 47.496,42 46.5,42 ; U6.5 47.9,60.805 47.5,61.205 46.9,61.205 ; v2(48.5,23.4) TEST.1@51.006,23.4 ; TEST.1@51.106,23.433 61.139,23.433 62.467,23.433 63.6,22.3 63.6,18.661 61.239,16.3 R7.1 ; U4.5 52.571,41 ; U4.6 53.521,41.621 52.9,41 52.571,41 ; 46.5,42 46.5,41.3 46.8,41 U3.5 52.571,41
  Bottom Layer w0.254: v1(37.057,55.655) 37.657,56.255 v1(37.657,61.155)
  Bottom Layer w0.8: ICSP1.2 2.5,10.8 11.2,2.1 14.2,2.1 ; v2(14.2,4.7) 14.2,2.1 ; v2(29.95,5.4) 29.95,3.75 31.6,2.1 ; v2(36.5,22.7) 37.7,22.7 44.1,29.1 ; P9.1 44.1,64.44 v1(44.1,61.205) v1(44.1,44.9) 44.1,29.1 ; v2(47.175,9.8) 47.175,10.825 44.3,13.7 ; v2(48.5,23.4) 45.6,23.4 44.3,24.7 ; 14.2,2.1 31.6,2.1 ; 31.6,2.1 38.7,2.1 44.3,7.7 44.3,13.7 ; 44.1,29.1 44.3,29.3 44.3,24.7 ; 44.3,13.7 44.3,24.7
\E\N\: C16.1 C21.1 D1.1 F1.2 R1.1 U2.5 U7.2 U7.7 U10.1 | length 80.8
  Top Layer w0.254: 10.8,49.9 10.8,46.472 13.072,44.2 16.35,44.2 18.3,46.15 R1.1 ; R1.1@18.484,48.568 18.484,47.809 18.884,47.409 23.534,47.409 v1@24.962,48.838 ; v1(24.2,17.5) 24.2,16.884 25.284,15.8 U7.2 ; v1@24.984,48.859 24.984,50.309 25.343,50.668 U2.5
  Top Layer w0.4: C21.1@5.6,55.518 5.8,55.718 7.54,55.718 U10.1 8.313,55.787 8.8,55.3 ; F1.2@9.4,49.962 9.338,49.9 10.8,49.9 12.027,49.9 D1.1 ; C16.1@24.35,11.8 v2(25.3,11.8) U7.7
  Top Layer w0.8: F1.2 8.683,49.916 8.683,55.183 8.8,55.3
  Bottom Layer w0.254: v1(25,48.8) 24.2,48 v1(24.2,17.5) 24.2,12.3 24.7,11.8 v2(25.3,11.8)
AD0: U7.36
AD1: J6.1 P5.2 R23.1 R23.3 R34.1 U7.37 | length 44.5
  Top Layer w0.4: U7.37 33.95,20.35 34.761,21.161 v2(35.11,21.161) ; v2(43.2,22.2) 44.7,22.2 50.15,27.65 50.15,31.692 51.054,32.596 52.096,32.596 52.096,33.362 51.858,33.6 53,33.6 R23.3 54,36.7 R23.1 54.75,38.3 J6.1
  Top Layer w0.8: J6.1 61.86,38.3 P5.2
  Bottom Layer w0.4: v2(35.11,21.161) 43,21.161 43.2,21.361 v2(43.2,22.2)
AD2: R20.2 R21.1 U7.38 | length 52.3
  Top Layer w0.4: U7.38 33.15,20.75 34.348,21.948 35.348,21.948 v2(35.4,22) ; v2(43.1,23.2) 44.4,23.2 48.419,27.219 48.419,34.056 51.613,37.25 v2(52,37.25) ; R20.2 50.532,51.668 50.4,51.8 v2(50.4,52.8) 50.4,53.8 50.659,54.059 R21.1
  Bottom Layer w0.4: v2(35.4,22) 35.5,21.9 41.8,21.9 v2(43.1,23.2) ; v2(50.4,52.8) 52,51.2 v2(52,37.25)
AD3: R32.2 R33.1 U7.39 | length 24.9
  Top Layer w0.4: U7.39 32.35,20.913 33.782,22.345 33.792,22.345 34.244,22.797 v2(34.244,24.414) ; v2(43.1,30.8) 44,30.8 44.6,31.4 ; R33.1 44.892,31.692 ; R32.2 44.892,33.592 44.6,33.3 44.6,31.4 ; R33.1@45.8,31.7 44.9,31.7 44.892,31.692 ; 44.6,31.4 44.892,31.692
  Bottom Layer w0.4: v2(34.244,24.414) 40.63,30.8 v2(43.1,30.8)
AD4: J2.3 J5.1 P3.1 P4.2 R22.1 R22.3 U7.40 | length 79.6
  Top Layer w0.4: v2(31.5,20.6) 31.5,18.5 U7.40 ; v2(43.3,20.2) 44.2,20.2 52.15,28.15 R22.3 54.139,29.15 R22.1 55.139,30.5 J5.1
  Top Layer w0.8: J2.3 57.18,64.68 P3.1 ; J5.1 61.699,30.5 P4.2
  Bottom Layer w0.4: v2(31.5,20.6) 31.9,20.2 v2(43.3,20.2) ; J2.3 56.4,62.4 60.5,58.3 60.5,34.6 58.539,32.639 J5.1
AD5: U7.41
ANT50: J1.1 R2.1 U8.23 | length 10.1
  Top Layer w1.05: R2.1@13.989,29.9 14.005,29.916 J1.1 ; J1.1@14.005,31.753 14.005,35.033 ; U8.23 15.079,36.178 ccw(c15.079,35.154) 14.355,35.878 ; 14.005,35.033 cw(c15.2,35.033) 14.355,35.878 ; 14.005,35.033 cw(c15.2,35.033) 14.273,35.786 cw(c15.2,35.033) 14.355,35.878
CAL: R8.1 TEST.2 | length 13.4
  Top Layer w0.254: R8.1 51.039,18.861 TEST.2@51.078,18.9
  Top Layer w0.4: TEST.2@51.106,18.861 TEST.2@61.139,18.861
CS: SD1.2 TP7.1 U7.8 | length 15.7
  Top Layer w0.254: SD1.2 16.366,7.566 16.7,7.9 v2(19.1,7.9) ; v2(19.6,10.7) 19.8,10.5 25,10.5 25.327,10.827 26.327,10.827 U7.8
  Bottom Layer w0.254: TP7.1@19.05,6.4 19.1,6.45 v2(19.1,7.9) 19.1,10.1 19.6,10.6 v2(19.6,10.7)
d+: R10.2 U7.4 | length 42.3
  Top Layer w0.254: R10.2@11.25,39.25 11.377,39.377 11.377,39.649 v2(12.501,40.773) ; v2(18.1,41) 19.2,41 20.307,39.893 20.307,31.219 17.209,28.122 17.209,21.955 24.637,14.527 24.794,14.527 25.121,14.2 U7.4 U7.4@26.5,14.373
  Bottom Layer w0.254: v2(12.501,40.773) 12.628,40.9 18,40.9 v2(18.1,41)
d-: R9.2 U7.3 | length 41.6
  Top Layer w0.254: R9.2@11.25,41.45 12.368,41.45 v2(12.501,41.583) ; v2(18.1,41.81) 19.299,41.81 20.761,40.348 20.761,30.887 17.765,27.891 17.765,22.041 24.806,15 U7.3
  Bottom Layer w0.254: v2(12.501,41.583) 12.628,41.456 17.662,41.456 18.016,41.81 v2(18.1,41.81)
EN_PH: R18.1 TP2.1 U6.4 U7.29 | length 61.3
  Top Layer w0.254: U6.4 49.55,60.157 50.1,59.607 R18.1
  Top Layer w0.4: U7.29 43.024,13.4 v2(47.9,18.276) ; U6.4 48.9,60.207 v2(48.9,61.4)
  Bottom Layer w0.4: TP2.1 46.724,17.1 v2(47.9,18.276) 47.9,20.5 50,22.6 50,35.154 48.895,36.26 48.895,60.3 48.9,60.305 v2(48.9,61.4)
EN_RADIO: R16.1 TP1.1 U3.4 U7.1 | length 42.9
  Top Layer w0.254: TP1.1 24.684,19.6 25,19.284 ; U7.1 25,18.1 25,19.284 ; v2(28.799,24.414) 28.691,24.414 26.604,22.327 25.379,22.327 25,21.948 25,19.284 ; v2(43.1,35.6) 46.637,35.6 48.6,37.563 48.6,38.311 ; R16.1@46.939,37.85 48.139,37.85 48.6,38.311 ; U3.4@47.589,39.9 47.643,39.953 U3.4 48.33,40.05 48.6,39.78 48.6,38.311
  Bottom Layer w0.254: v2(28.799,24.414) 39.985,35.6 v2@43.1,35.6
EN_SENSORS: R17.1 TP3.1 U4.4 U7.28 | length 45.7
  Top Layer w0.254: R17.1 49.863,42.463 v2(49.6,42.2) 49.75,42.05 51.361,42.05 51.621,42.309 U4.4
  Top Layer w0.4: U7.28 43.9,12.6 v2(48.7,17.4)
  Bottom Layer w0.254: TP3.1 48.7,15.2 v2(48.7,17.4)
  Bottom Layer w0.4: v2(48.7,17.4) 48.7,19.903 50.7,21.903 50.7,35.303 49.695,36.308 49.695,42.105 v2(49.6,42.2)
GND: C1.2 C2.2 C3.2 C4.2 C5.2 C6.2 C7.2 C8.2 C9.2 C11.2 C12.2 C13.2 C14.2 C15.2 C16.2 C17.2 C18.2 C20.2 C21.2 C22.2 D3.2 ICSP1.6 J1.2 J1.3 J2.1 J3.1 J4.1 J8.2 J9.1 J10.G P1.3 P2.3 P3.3 P7.2 P8.2 P9.2 P10.2 pad.1 R1.2 R4.2 R8.2 R11.1 R12.1 R15.2 R16.2 R17.2 R18.2 R19.2 R21.2 R23.2 R33.2 R34.2 RESET.2 SD1.6 SD1.9 SD1.10 SD1.11 SD1.12 U1.3 U1.7 U1.9 U1.11 U2.1 U2.6 U2.15 U2.16 U2.17 U2.21 U3.2 U3.3 U4.2 U4.3 U5.2 U6.2 U6.3 U7.5 U7.15 U7.23 U7.35 U7.43 U8.1 U8.8 U8.11 U8.20 U8.21 U8.22 U8.24 U8.26 U8.27 U8.28 U8.33 U8.41 U8.47 U10.2 USB1.5 | length 58.5
  Top Layer w0.254: U8.28 18.6,24.2 18.9,23.9 C11.2 ; v1(24.184,53.568) 24.225,53.609 24.6,53.609 25.541,52.668 U2.1 ; R4.2@25.384,47.368 25.384,47.968 26.684,49.268 U2.6 ; U7.5@26.327,13.573 U7.5 ; U2.17@28.184,53.968 U2.17@28.184,53.889 ; 28.764,54.469 U2.17@28.184,53.889 ; 29.15,16.4 U7.43 ; U7.15 30.75,9.2 ; U1.7 35.157,58.055 U1.11@35.657,58.555 ; 35.55,15.8 U7.35 ; 35.65,8.6 40.25,8.6 40.85,8 C12.2 ; U1.3 U1.11@35.657,58.555 ; U1.9 36.157,58.055 35.911,58.301 U1.11@35.657,58.555 ; U6.3 49.25,57.457 49.8,58.007 R18.2 ; R21.2 v2(53.95,54.059) ; U2.17@28.184,53.889 U2.17 U2.17@28.184,53.889
  Top Layer w0.5: USB1.5@5.25,40.75 6.55,40.75 v1(6.95,40.35) ; R12.1@11.25,37.25 v1(12.15,37.25) ; R11.1@11.25,43.45 v1(12.15,43.45) ; R1.2@18.484,50.168 19.134,50.818 19.884,50.818 ; C6.2 20.641,48.768 19.884,49.525 19.884,50.818 ; C1.2@23.184,50.818 19.884,50.818 ; U5.2 U6.2
  Top Layer w0.8: P3.3 52.4,67.3 J2.1 ; J4.1 59.603,49.09 P2.3 ; J3.1 61.61,57.637 P1.3
  other v1: 2.989,1.087 62,1.087 1.989,1.398 3.935,1.398 61,1.398 62.945,1.398 4.591,2 63.602,2 1.387,2.055 60.398,2.055 1.077,3 4.6,3 4.902,3 46.6,3 52.6,3 58.6,3 60.087,3 63.913,3 4.591,3.945 63.602,3.945 1.387,4 60.398,4 2.044,4.602 3.989,4.602 61.055,4.602 63,4.602 2.989,4.913 62,4.913 7.6,9 31.6,9 49.6,9 55.6,9 61.6,9 19.659,12.3 16.6,15 34.6,15 52.6,15 58.6,15 7.6,21 13.6,21 55.6,21 61.6,21 5.732,23.8 8.989,23.8 11.238,23.8 12.816,23.824 18.699,23.899 14.4,24.392 5.732,26 8.955,26 11.238,26 12.778,26.112 15.1,26.112 46.6,27 12.789,27.7 15.286,27.7 28.6,30.676 22.578,31.098 12.789,31.203 15.286,31.203 16.355,31.778 18.63,32.924 28.625,32.955 7.6,33 25.6,33 31.6,33 55.6,33 61.6,33 22.603,33.377 30.4,33.733 15.983,34.5 25.621,34.6 32.4,34.82 28.625,34.955 15.286,35.002 18.655,35.203 12.789,35.25 22.603,35.377 30.425,36.012 13.539,36.75 25.646,36.879 28.625,36.955 32.425,37.099 18.655,37.203 22.603,37.377 15.289,37.448 51.087,37.961 30.425,38.012 25.646,38.879 22.6,39 28.6,39 40.6,39 32.425,39.099 18.655,39.203 14.429,39.5 30.425,40.012 25.646,40.879 22.6,41 16.156,42.6 23.4,46.468 42.842,47.1 45.4,47.1 49.8,48.014 47.9,48.5 20.307,48.768 29.8,49.2 42.867,49.379 45.425,49.379 25.859,49.525 19.8,49.916 56.312,50.6 54.139,50.712 21.9,50.818 4.6,51 34.6,51 40.6,51 58.6,51 27.134,51.118 28.234,51.118 42.867,51.379 45.425,51.379 27.134,52.218 28.234,52.218 42.867,53.379 45.425,53.379 29.509,53.532 56.22,54 29.5,54.571 31.6,57 61.6,57 53.921,57.8 51.971,57.9 49.6,58 34.957,58.555 36.357,58.555 47.9,58.755 4.6,63 46.6,63 58.6,63 3,65.087 62,65.087 2,65.398 3.945,65.398 61,65.398 62.945,65.398 4.602,66 63.602,66 1.398,66.055 60.398,66.055 1.087,67 4.913,67 60.087,67 63.913,67 4.602,67.945 63.602,67.945 1.398,68 60.398,68 2.055,68.602 4,68.602 61.055,68.602 63,68.602 3,68.913 62,68.913
  other v2: 40.97,2.4 23.572,3.1 51.078,4.5 41.15,8.5 51.024,12.8 21.6,13.831 22.85,14.7 0.7,18.135 40.6,19.371 2.5,19.834 26,19.927 2.989,22.315 7.15,22.36 40.598,22.635 2.925,27.44 7.3,27.44 49.2,33.577 51.595,35.2 17.412,43.8 52.8,44.6 33.84,44.951 35.84,45.868 49.9,46.468 56.7,47.9 5.6,52.834 30.579,56.545 6.77,57.545 56.6,57.637 31.857,58.164 38.957,58.518 40.857,58.518 42.757,58.518 30.558,58.793 9.5,61.332 9.8,64.148 39.6,64.9 30.75,65.419 16.737,65.552 8.2,66.1 52.1,66.2 30.75,66.3 41.1,66.427 30.75,67.215 50.4,67.6 15.5,67.942 9.8,68.1 29.441,68.2 18.3,68.9
IO2: U7.19
IO3: U7.18
IO4: R14.1 U7.25 | length 38.1
  Top Layer w0.254: v2(18.9,21.8) 19.7,21.8 R14.1 ; U7.25 v2(39.4,10.2)
  Bottom Layer w0.254: v2(18.9,21.8) 18.3,21.2 18.3,16.2 27.8,6.7 40.3,6.7 40.632,7.032 40.632,7.868 39.4,9.1 v2(39.4,10.2)
IO5: J5.2 P4.1 U7.31 | length 30.8
  Top Layer w0.4: U7.31 43.3,15 49,20.7 v2(50.7,20.7)
  Top Layer w0.8: J5.2 62.039,28.5 P4.1
  Bottom Layer w0.4: v2(50.7,20.7) 52.9,20.7 58.4,26.2 58.4,28.361 J5.2
IO6: R22.2 U7.27 | length 29.7
  Top Layer w0.4: U7.27 44.4,11.8 49.656,17.056 49.656,19.727 49.89,19.961 50.958,19.961 51.5,20.503 v2(51.5,21.8) ; v2(52,30.2) 52,31.361 R22.2
  Bottom Layer w0.4: v2(51.5,21.8) 52,22.3 v2(52,30.2)
IO10: U7.30
IO11: U7.12
IO12: U7.26
IO13: U7.32
lora_rx: TP4.1 U7.21 U8.7 | length 55.3
  Top Layer w0.254: U8.7 35.11,42.889 35.29,42.709 v2(35.29,42.7) ; U7.21 35.55,5.507 35.857,5.2 38.802,5.2 39.19,5.588 v2(39.19,7.6)
  Bottom Layer w0.254: TP4.1 35.29,39.5 ; v2(35.29,42.7) 35.29,39.5 ; v2(39.19,7.6) 35.7,7.6 26.9,16.4 26.9,25.8 35.29,34.19 35.29,39.5
lora_tx: TP5.1 U7.20 U8.6 | length 57.6
  Top Layer w0.254: U7.20 34.75,5.498 35.648,4.6 39.1,4.6 40,5.5 v2(40,7.6) ; v2(36.1,42.7) 36.289,42.889 36.38,42.889 U8.6
  Bottom Layer w0.254: v2(36.1,42.7) 36.1,39.5 ; TP5.1 36.1,39.5 ; v2(40,7.6) 40,7.684 39.452,8.232 35.968,8.232 27.71,16.49 27.71,25.51 36.1,33.9 36.1,39.5
MISO: ICSP1.1 SD1.7 U7.11 | length 29.3
  Top Layer w0.254: ICSP1.1 5.585,13.6 9.296,13.6 10.9,11.996 ; SD1.7 10.866,11.962 10.9,11.996 ; U7.11 26.5,8.727 14.169,8.727 10.9,11.996
MOSI: ICSP1.4 SD1.3 U7.10 | length 29.9
  Top Layer w0.254: ICSP1.4 3.716,14.379 10.588,14.379 v2(15.166,9.8) 15.566,9.4 U7.10 ; v2(15.159,7.9) 15.266,7.793 SD1.3
  Bottom Layer w0.254: v2(15.159,7.9) 15.159,9.793 v2(15.166,9.8)
NetC6_1: C6.1 U2.4 | length 4.4
  Top Layer w0.254: C6.1 23.775,48.768 24.5,49.493 24.5,50.502 24.484,50.518 25.134,51.168 U2.4
NetC10_1: C10.1 U5.6 | length 2.1
  Top Layer w0.254: C10.1 C10.1@48.85,50.857
  Top Layer w0.4: C10.1@48.85,50.857 U5.6
NetC10_2: C10.2 U5.4 | length 2.1
  Top Layer w0.254: C10.2@46.95,50.957 C10.2
  Top Layer w0.4: C10.2@46.95,50.957 U5.4
NetC11_1: C11.1 R13.2 R14.2 U8.32 | length 7.9
  Top Layer w0.254: C11.1 22.489,23.9 22.539,23.95 ; R14.2 21.939,21.7 22.539,22.3 22.539,23.95 ; R13.2 22.689,23.8 22.539,23.95 ; U8.32 23.68,25.541 22.539,24.4 22.539,23.95
NetC12_1: C12.1 L3.2 U7.24 U7.44 | length 27.6
  Top Layer w0.4: U7.44 28.35,19.55 v2(28.799,19.999) ; U7.24 42.45,9.4 C12.1 43.55,9.5 43.8,9.75 L3.2
  Bottom Layer w0.4: v2(28.799,19.999) 28.799,19.801 30.5,18.1 37.3,18.1 40.3,15.1 v2(40.3,9.4)
NetC14_1: C14.1 U7.42 | length 4.1
  Top Layer w0.4: C14.1@28.15,21.5 28.609,21.5 29.95,20.159 U7.42
NetC15_1: C15.1 U7.6 | length 2.6
  Top Layer w0.4: C15.1@24.35,13.6 25.35,12.6 U7.6
NetC17_1: C17.1 U7.16 X1.1 | length 9.8
  Top Layer w0.254: C17.1 X1.1 31.55,2.4 31.55,3.6 U7.16
NetC18_1: C18.1 U7.17 X1.2 | length 10.1
  Top Layer w0.254: U7.17 32.35,2.4 X1.2 C18.1
NetD2_2: D2.2 D3.1 J8.1 P7.1 | length 15.9
  Top Layer w0.5: 13.599,62.168 13.599,59.468 13.599,52.738 D2.2@13.784,52.553
  Top Layer w0.8: 13.599,59.468 15.761,59.468 17.484,61.191 D3.1
NetF1_1: F1.1 USB1.1 | length 5.4
  Top Layer w0.5: USB1.1@5.25,43.35 7.15,43.35 8.75,44.95 F1.1@8.75,46.15
NetJ3_3: J3.3 P1.1 R20.1 | length 10.2
  Top Layer w0.4: R20.1 56.431,51.668 J3.3
  Top Layer w0.8: J3.3 61.61,53.637 P1.1
NetJ4_3: J4.3 P2.1 R32.1 | length 20.4
  Top Layer w0.4: R32.1 47.123,34.623 50.387,37.887 50.387,39.061 51.676,40.35 53.472,40.35 57.009,43.887 J4.3
  Top Layer w0.8: J4.3 61.777,43.887 P2.1
NetJ10_S: J10.S R2.2 | length 9
  Top Layer w1.05: J10.S@7.305,24.91 12.921,24.91 ; 12.921,24.926 ccw(c12.921,26.021) 14.015,26.021 R2.2@14.015,27.7
NetL1_2: L1.2 U2.20 | length 2.6
  Top Layer w0.254: 26.284,54.568 26.357,54.495 26.357,54.409 26.684,54.082 U2.20
  Top Layer w0.5: 24.684,56.168 L1.2
NetL2_1: L2.1 U1.4 | length 3.3
  Top Layer w0.254: 34.557,61.855 L2.1 ; U1.4 35.157,61.255
  Top Layer w0.4: 34.557,61.855 35.157,61.255
NetL2_2: L2.2 U1.2 | length 3.3
  Top Layer w0.254: U1.2 36.157,61.155 ; 36.757,61.755 L2.2
  Top Layer w0.4: 36.157,61.155 36.757,61.755
NetR3_1: R3.1 R5.1 U2.8 | length 4.4
  Top Layer w0.254: R3.1@27.684,47.368 U2.8 ; R3.1 R5.1
NetR3_2: R3.2 R4.1 U2.7 | length 6.5
  Top Layer w0.254: R4.1 26.584,45.868 ; U2.7 27.184,48.768 26.584,48.168 26.584,45.868 ; R3.2 26.584,45.868
NetR5_2: R5.2 R6.1 U2.11 | length 9.1
  Top Layer w0.254: U2.11 30.534,50.668 31.234,49.968 31.234,46.268 30.834,45.868 ; R5.2 30.834,45.868 ; R6.1 30.834,45.868
NetR6_2: R6.2 R19.1 U2.12 | length 8.2
  Top Layer w0.254: U2.12 31.684,51.168 32.484,50.368 R6.2 R19.1
NetR9_1: R9.1 R11.2 USB1.2 | length 6.4
  Top Layer w0.254: USB1.2@5.25,42.7 7.8,42.7 ; R9.1@9.117,41.45 8.55,41.45 7.8,42.2 7.8,42.7 ; R11.2 8.55,43.45 7.8,42.7
NetR10_1: R10.1 R12.2 USB1.3 | length 8.7
  Top Layer w0.254: USB1.3@5.25,42.05 6.95,42.05 7.95,41.05 7.95,39.95 ; 8.65,39.25 7.95,39.95 ; R12.2@9.208,37.25 R12.2 8.75,37.25 7.95,38.05 7.95,39.95
NetR15_1: R15.1 U7.33 | length 4.8
  Top Layer w0.254: U7.33 41.15,16.6 41.85,17.3 R15.1
NetU5_3: U5.3 U5.5 U6.1 | length 5.1
  Top Layer w0.4: U6.1 U5.3 46.95,54.257 47.9,53.307 U5.5
PV: C1.1 C2.1 D2.1 L1.1 TP8.1 U2.2 | length 15.2
  Top Layer w0.254: TP8.1@16.737,55.152 18.636,55.152 18.684,55.2 ; 24,52.447 24.805,52.447 24.934,52.318 25.084,52.168 U2.2
  Top Layer w0.5: 18.684,55.768 L1.1 ; C2.1@20.284,52.318 21.284,52.318 22.993,52.44 23.084,52.447 24,52.447 ; C1.1 23,52.418 24.518,52.418
  Top Layer w0.7: 18.684,55.768 18.684,55.2 18.684,53.918 C2.1@20.284,52.318
RESET: ICSP1.5 R7.2 RESET.1 TP6.1 U7.13 | length 74.2
  Top Layer w0.254: ICSP1.5 5.182,18.276 9.7,18.276 17.276,10.7 v1(18.4,10.7) ; v1(27.85,5.2) 28.75,5.2 29.15,5.6 U7.13 ; v1(43.1,10.9) 43.3,11.1 51.239,11.1 51.517,10.822 60.95,10.822 61.036,10.736 RESET.1@61.25,10.522 ; RESET.1@61.122,10.822 61.239,10.939 R7.2
  Bottom Layer w0.254: v1(18.4,10.7) 19.15,11.45 21.3,11.45 27.55,5.2 ; TP6.1 27.55,5.2 ; v1@27.85,5.1 v1(27.85,5.2) ; 28.8,5.4 28.6,5.2 ; v1(43.1,10.9) 43.1,8.6 40.7,6.2 29.6,6.2 28.6,5.2 ; 27.55,5.2 v1(27.85,5.2) ; v1(27.85,5.2) 28.6,5.2
SCK: ICSP1.3 SD1.5 U7.9 | length 31.3
  Top Layer w0.254: ICSP1.3 11.495,15.595 11.917,15.173 11.927,15.173 13.1,14 ; SD1.5 v2(13.066,8.706) ; v2(13.1,13.2) 13.1,14 ; U7.9 26.346,10.046 17.054,10.046 13.1,14
  Bottom Layer w0.254: v2(13.066,8.706) 13.066,13.166 v2(13.1,13.2)
VBAT: C20.1 J9.2 P10.1 U2.18 U10.5 | length 8
  Top Layer w0.254: U2.18 27.684,54.268 27.884,54.468 27.884,54.768 28.04,54.925 v1(28.05,54.925)
  Top Layer w0.4: C20.1 9.59,57.7 10.762,57.7 v2(11,57.462) ; U10.5 10.743,55.787 v2(11,56.043)
  Top Layer w0.8: v2(11.726,56.043) v2(11,56.043) v2(11,56.753) ; v2(11.726,56.753) v2(11,56.753) ; v2(11.726,57.462) v2(11,57.462) v2(11,56.753)
VCC_PH_TURB: J3.2 J4.2 P1.2 P2.2 U5.1 | length 34.1
  Top Layer w0.4: 50.15,56.309 49.25,56.309 48.85,55.909 U5.1 48.85,54.098 49.65,53.298 49.65,50.15 50.4,49.4 52.909,49.4 56.422,45.887 J4.2
  Top Layer w0.8: 50.15,56.309 53.95,56.309 54.622,55.637 J3.2 P1.2 ; J4.2 61.237,45.887 P2.2
VCC_RADIO: R13.1 U3.1 U8.12 U8.34 | length 41.8
  Top Layer w0.254: R13.1 25.939,23.8 26.22,24.081 U8.34
  Top Layer w0.5: v1(26.139,27.9) v1(26.139,27.1) 26.139,26.059 U8.34 ; v1@27.139,39.701 v1(27.139,40.85) v1(27.139,41.9) 28.56,41.9 ; U8.12 28.76,42.1 28.56,41.9 ; U3.1@44.539,41.9 28.56,41.9
  Bottom Layer w0.5: v1(26.139,27.1) v1(26.139,27.9) 27.139,28.9 v1(27.139,40.85) v1(27.139,41.9)
  other v1: 27.14,39.7
VCC_SENSORS: J2.2 J6.2 P3.2 P5.1 U4.1 | length 41.1
  Top Layer w0.4: U4.1 53.521,45.079 v2(55.2,43.4)
  Top Layer w0.8: J2.2 54.4,67.36 P3.2 ; J6.2 58.9,35.9 P5.1
  Bottom Layer w0.4: J2.2 54.3,63.8 54.3,61.4 55.2,60.5 v2(55.2,43.4) 55.2,37.8 56.7,36.3 J6.2
VSTOR: C3.1 C4.1 C5.1 C22.1 D1.2 P8.1 U1.5 U1.6 U1.8 U2.3 U2.19 | length 41
  Top Layer w0.254: v1(24.584,51.668) U2.3 ; v1(26.984,54.668) 27.184,54.468 U2.19 ; 27.184,56.118 27.234,56.168 ; 27.234,58.168 27.221,58.181 27.184,58.218 27.234,58.268 ; U1.6 34.657,55.755 v1(35.207,55.205) ; 35.657,55.655 U1.8
  Top Layer w0.4: v1(35.207,55.205) 35.657,55.655
  Top Layer w0.5: 27.234,56.168 27.234,58.168
  Top Layer w0.8: C22.1 14.429,47.652 14.877,48.1 D1.2 16.933,49.95 v1(16.983,49.9)
  Bottom Layer w0.4: v2(33.5,60.909) 33.5,56.911 v1(35.207,55.205)
  Bottom Layer w0.5: v1(24.584,51.668) 24.584,52.268 v1(26.984,54.668)
  Bottom Layer w0.8: v1(15.963,49.9) v1(16.983,49.9) 18,49.9 24.7,56.6 v1(24.7,60.5) v1(24.7,61.205)
pads on no net: SD1.1 SD1.8 U2.9 U2.10 U2.13 U2.14 U7.22 U8.2 U8.3 U8.4 U8.5 U8.9 U8.10 U8.13 U8.14 U8.15 U8.16 U8.17 U8.18 U8.19 U8.25 U8.29 U8.30 U8.31 U8.35 U8.36 U8.37 U8.38 U8.39 U8.40 U8.42 U8.43 U8.44 U8.45 U10.3 U10.4 USB1. USB1.4

## Polygon pours and split planes (outlines as drawn)
GND on Top Layer "Top Layer-GND 2" (solid, pour order 38): 0,0 64,0 65,0 65,70 0,70
PV on Top Layer "Top Layer-PV" (solid, pour order 14): 17.484,59.268 17.484,53.268 16.234,53.268 16.234,51.418 23.984,51.418 24.784,52.218 24.784,52.518 24.718,52.518 23.968,53.268 20.484,53.268 20.484,59.268
GND on Top Layer "Top Layer-GND 1" (solid, pour order 32): 16.989,20.9 2.989,20.9 2.989,39.35 16.989,39.35
GND on Top Layer "Top Layer-GND" (solid, pour order 18): 27.85,17.1 27.85,8.1 36.85,8.1 36.85,17.1
3.3V on Top Layer "Top Layer-3.3V" (solid, pour order 8): 36.457,59.555 36.457,60.911 38.955,63.409 42.4,63.4 42.4,66.4 45.65,66.4 45.65,60.455 36.857,60.455 36.757,60.355 36.757,59.555
NetD2_2 on Top Layer "Top Layer-NetD2_2" (solid, pour order 20): 14.834,67.626 10.734,67.626 10.734,60.909 12.778,59.227 12.778,51.168 14.221,51.168 14.834,51.781
NetL1_2 on Top Layer "Top Layer-NetL1_2" (solid, pour order 16): 23.484,59.468 23.484,55.768 25.584,53.668 26.984,53.668 26.984,54.468 26.184,55.268 26.184,59.468
VSTOR on Top Layer "Top Layer-VSTOR" (solid, pour order 12): 34.857,59.555 34.857,60.955 34.061,61.75 26.35,61.75 26.425,64.1 23.3,64.1 23.3,60.105 34.007,60.105 34.557,59.555
VSTOR on Top Layer "Top Layer-VSTOR 1" (solid, pour order 10): 26.984,53.868 26.984,54.468 26.3,55.152 26.3,61.955 28.6,61.955 28.6,55.268 27.884,55.268 27.384,54.768 27.384,53.918 27.034,53.918
no net on Top Layer "Top Layer-No Net" (solid, pour order 30): 43.622,60.455
GND on Bottom Layer "Bottom Layer-GND" (solid, pour order 36): 0,0 64,0 65,0 65,70 0,70
VBAT on Bottom Layer "Bottom Layer-VBAT 1" (solid, pour order 34): 10.022,57.522 10.022,55.091 12.238,55.091 20.3,63.153 20.3,63.9 27.006,63.9 28.44,65.334 28.44,68 20.5,68 17.1,64.6
VBAT on Bottom Layer "Bottom Layer-VBAT" (solid, pour order 22): 26.984,53.568 28.984,53.568 28.984,67.368 25.984,67.368 25.984,59.318 26.984,58.318

## Keep-outs
Keep-Out Layer:
  lines w0.254: 0,0 0,70 65,70 65,0 0,0

## Other copper
Top Layer:
  region net GND: 18.655,40.003 15.855,40.003 15.855,36.911 18.655,36.911
  region net GND: 16.322,35.002 14.73,35.002 14.73,31.674 16.322,31.674
  region net GND: 13.28,35.228 11.572,35.228 11.572,31.674 13.28,31.674
  region net GND: 18.63,32.924 14.93,32.924 14.93,30.203 18.63,30.203
  region net GND: 18.48,35.453 15.286,35.453 15.286,34.358 18.48,34.358
  pour cut-out: 13.142,29.1 13.142,28.5 14.839,28.5 14.834,28.505 14.834,29.1

## Silkscreen, mask and mechanical layers (free items; w line width, h text height)
Top Overlay:
  text "V1.0" at 41.4,5.234 h1
  text "Endre Davoy" at 41.5,3.3 h1
  text "ELSYS 2019" at 41.5,1.35 h1
Bottom Overlay:
  text "BAT" at 26.4,61 h1.8 r180